# Altium PCB HatBoard_Group10.PcbDoc (part 2 of 2)
Units mm, origin at the board's own origin, x right, y up, seen from the top; angles counter-clockwise.
Board outline 64 x 85 mm, 4 copper layers (Top Side, Ground Plane, Power Plane, Bottom Side), stack 0.844 mm thick; 101 components, 62 nets, 332 pads, 89 vias.
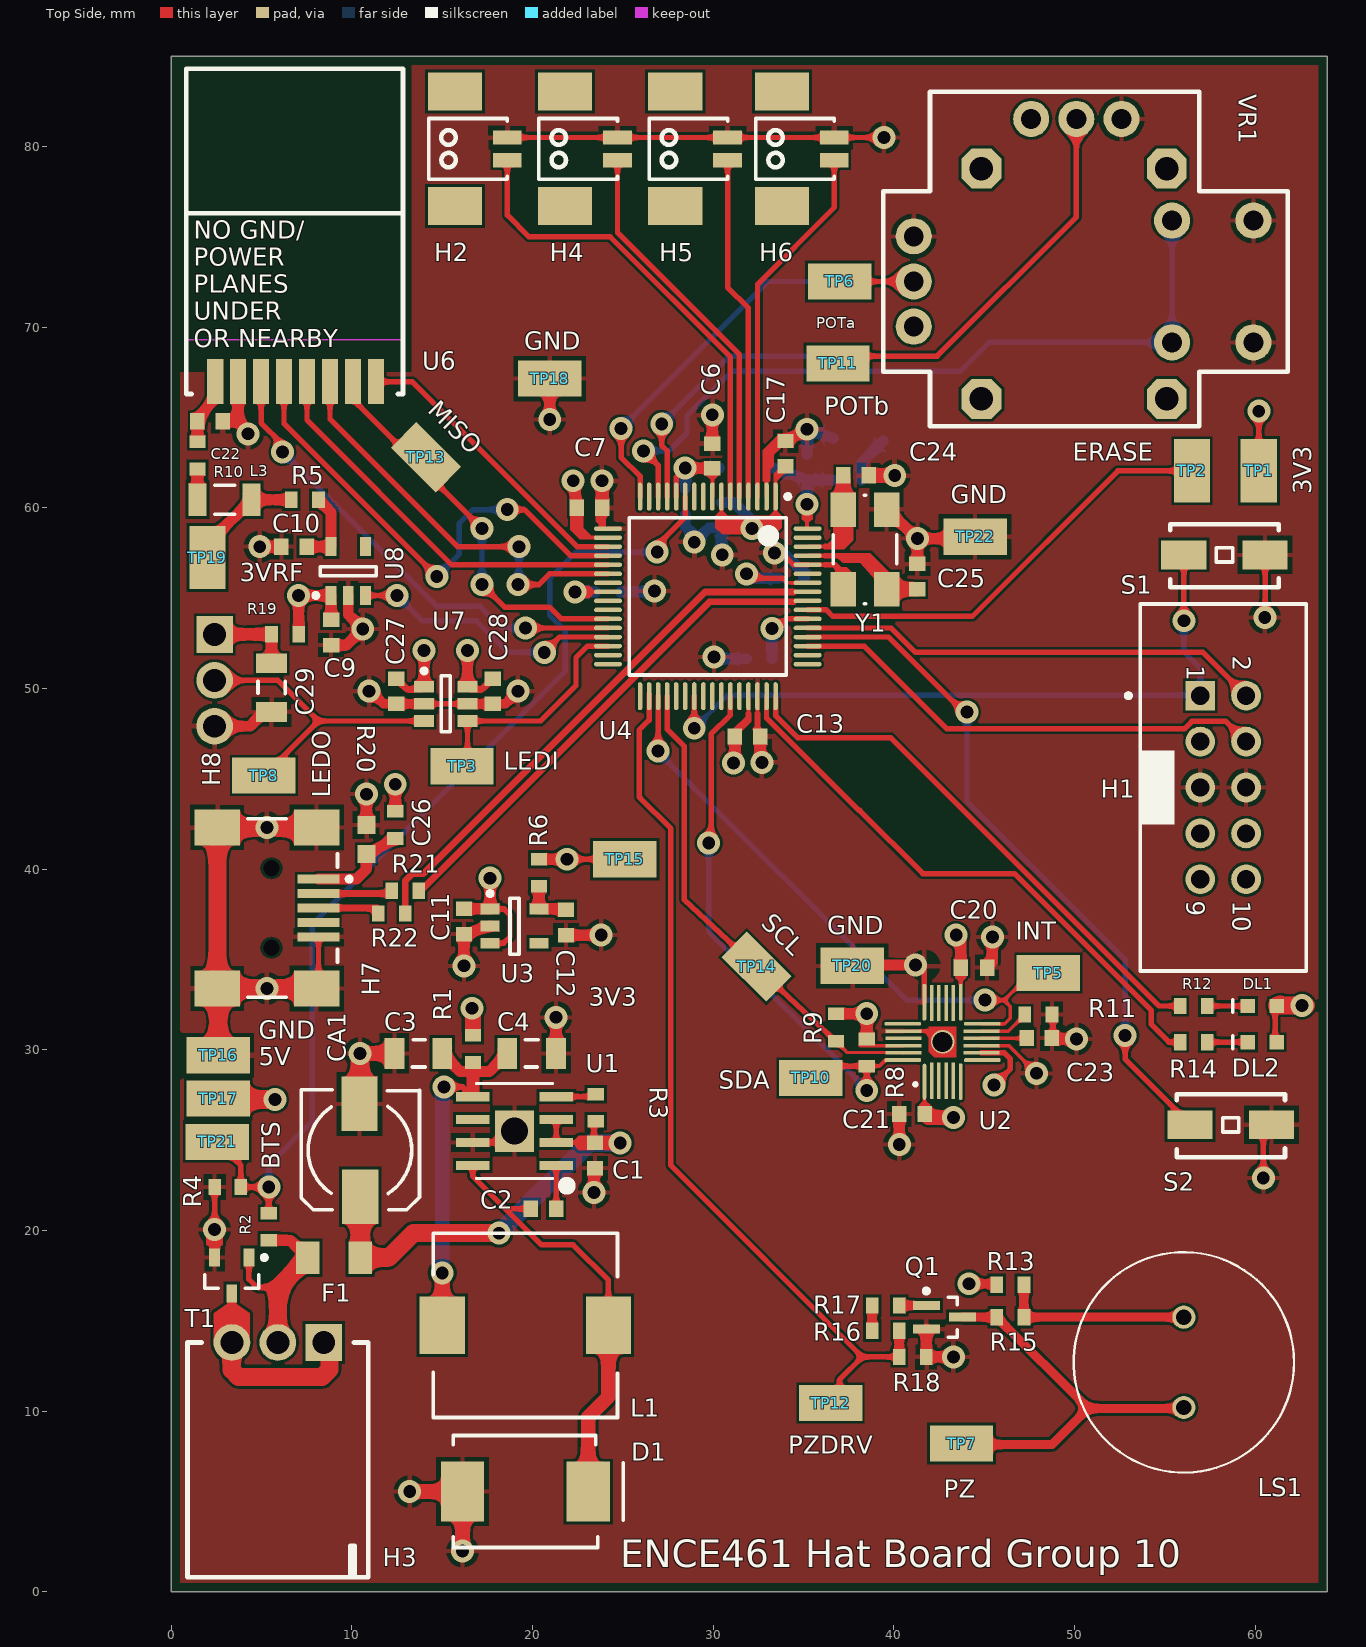
[diagram p0: Top Side view]

## Silkscreen, mask and mechanical layers (free items; w line width, h text height) (continued)
Mechanical 1: (continued)
  region: 32.45,47.95
Board Outline:
  lines w0.254: 0,0 64,0 64,85 ; 0,0.05 0,85 63.9,85 63.95,85

## Text inside footprints (layer, text, board x,y; h text height)
H1: Top Overlay "9" at 56.21,38.24 h1 r270; Top Overlay "10" at 58.75,38.24 h1 r270; Top Overlay "1" at 56.21,51.3 h1 r270; Top Overlay "2" at 58.75,51.8 h1 r270
H7: Mechanical 1 "PCB Edge" at -0.132,41.886 h1 r270
U1: Mechanical 13 "*" at 20.93,24.344 h1 r180
U6: Top Overlay "NO GND/ / POWER / PLANES / UNDER / OR NEARBY" at 1.25,68.9 h1